# Altium PCB PCB1.PcbDoc (part 6 of 6)
Units mil, origin at the board's own origin, x right, y up, seen from the top; angles counter-clockwise.
Board outline 58000 x 19845 mil, 4 copper layers (Top Layer, MidLayer1, MidLayer2, Bottom Layer); 162 components, 222 nets, 4894 pads, 2245 vias.
Unrouted connection lines stored in the file: 192.
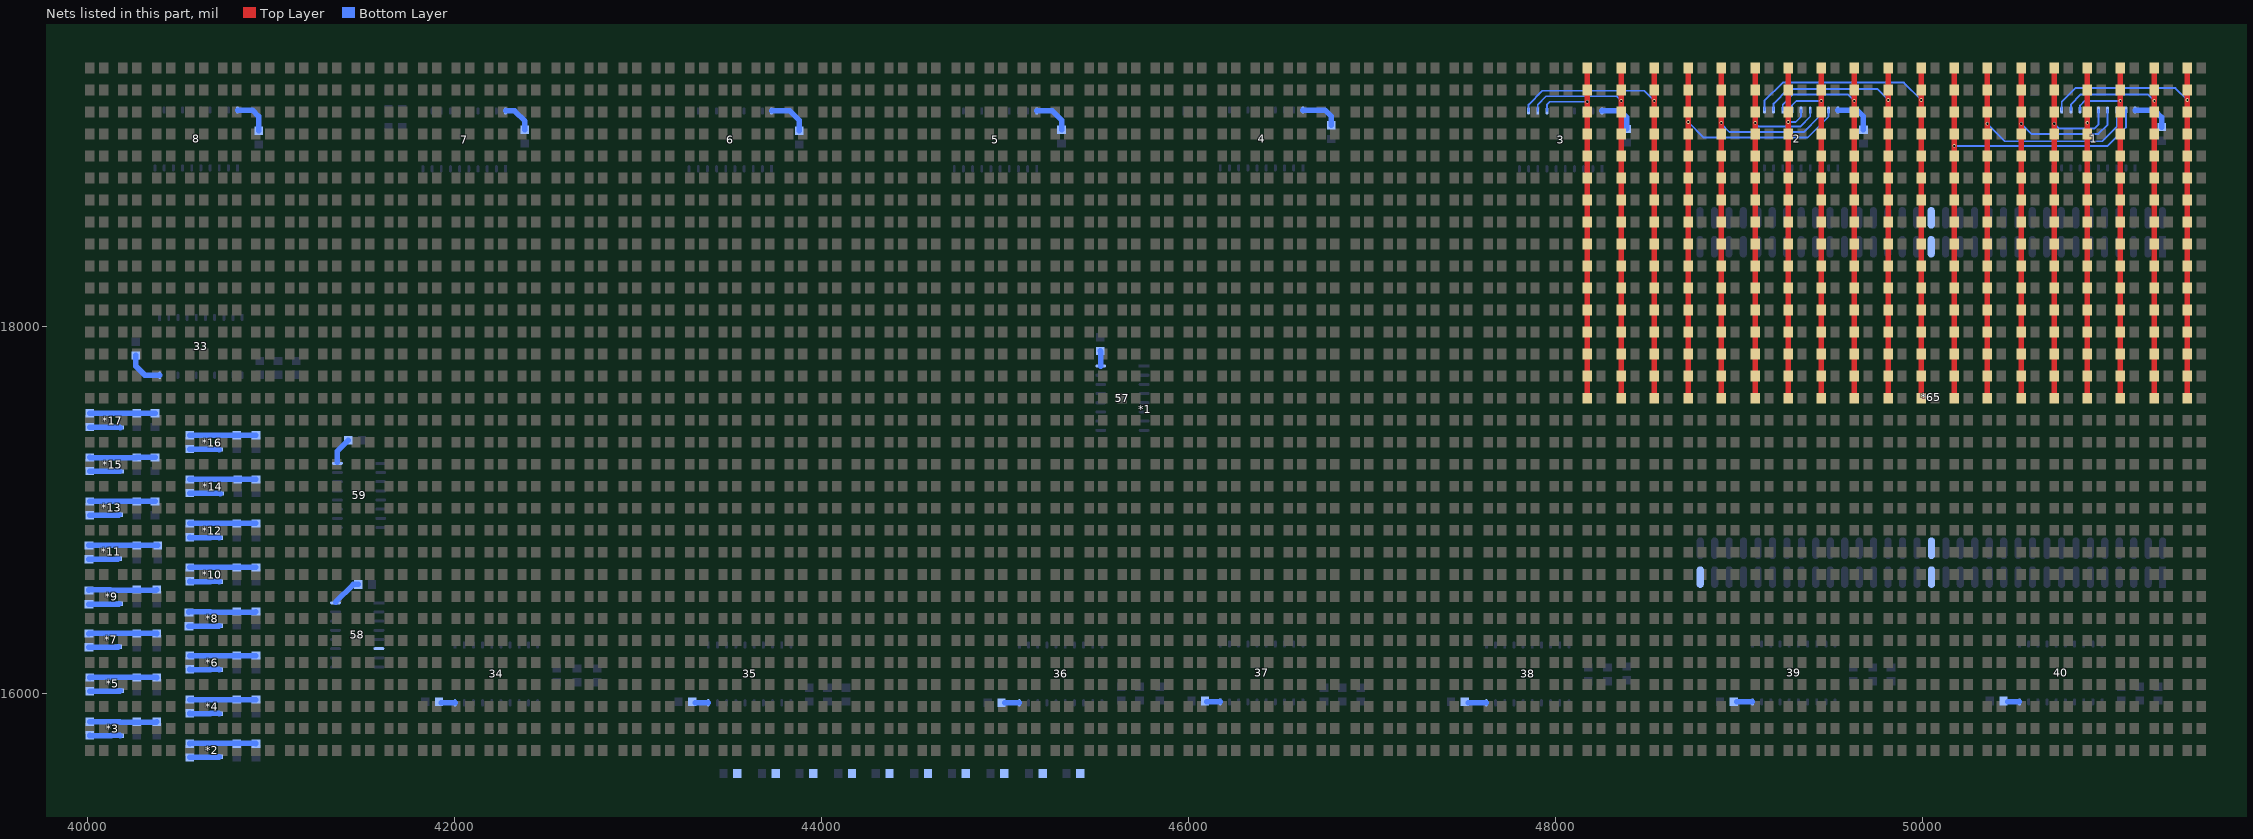
[diagram p8: the nets of this part, all layers, seen from the top]

## Via types
v1: diameter 20, hole 12, Top Layer to MidLayer1, 2032 vias
v2: diameter 20, hole 12, Top Layer to Bottom Layer, 143 vias
v3: diameter 20, hole 12, MidLayer2 to Bottom Layer, 70 vias

## Nets (pads, with @x,y where several pads share a name; then routed paths per layer and width w, separated by ;. In a path a pad name is that pad's centre, name@x,y a point inside that pad or via, vN(x,y) a via of type N, cw(c..) or ccw(c..) an arc to the next point about the centre after c; other vN are vias at no path point) (continued)
Net*1_126: 3.14 *1.126 | length 2061.3
  Top Layer w30: *1.126@48175,17605 *1.126@48175,19170 *1.126@48175,19405
  Bottom Layer w10: 3.14@47955,19174.96 47955,19210 47970,19225 v2(48175,19225)
Net*1_127: 3.13 *1.127 | length 2319
  Top Layer w30: *1.127@48360,17605 *1.127@48360,19170 *1.127@48360,19405
  Bottom Layer w10: 3.13@47905,19174.96 47905,19210 47950,19255 48335,19255 v2(48360,19230)
Net*1_128: 3.12 *1.128 | length 2573.9
  Top Layer w30: *1.128@48540,17605 *1.128@48540,19170 *1.128@48540,19290 *1.128@48540,19405
  Bottom Layer w10: 3.12@47855,19174.96 47855,19210 47930,19285 48485,19285 v2(48540,19230)
Net*1_129: 2.19 *1.129 | length 2682.8
  Top Layer w30: *1.129@48725,17615 *1.129@48725,19050 *1.129@48725,19170 *1.129@48725,19415
  Bottom Layer w10: v2(48725,19115) 48810,19030 49375,19030 49490,19145 2.19@49490,19179.96
Net*1_130: 2.18 *1.130 | length 2423.8
  Top Layer w30: *1.130@48905,17615 48905,18215 *1.130@48905,19050 *1.130@48905,19170 *1.130@48905,19415
  Bottom Layer w10: v2@48905,19105 48950,19060 49355,19060 49440,19145 2.18@49440,19179.96
  other v2: 48905,19110
Net*1_131: 2.17 *1.131 | length 2166
  Top Layer w30: *1.131@49090,17615 *1.131@49090,19170 *1.131@49090,19415
  Bottom Layer w10: v2(49090,19110) 49110,19090 49335,19090 49390,19145 2.17@49390,19179.96
Net*1_132: 2.16 *1.132 | length 1912.4
  Top Layer w30: *1.132@49270,17615 49270,18455 *1.132@49270,19170 *1.132@49270,19415
  Bottom Layer w10: v2@49275,19115 49310,19115 49340,19145 2.16@49340,19179.96
  other v2: 49270,19115
Net*1_133: 2.15 *1.133 | length 1995.4
  Top Layer w30: *1.133@49450,17615 *1.133@49450,19290 *1.133@49450,19415
  Bottom Layer w10: 2.15@49290,19179.96 49290,19205 49315,19230 v2(49450,19230)
Net*1_134: 2.14 *1.134 | length 2257.3
  Top Layer w30: *1.134@49630,17615 *1.134@49630,19290 *1.134@49630,19415
  Bottom Layer w10: 2.14@49240,19179.96 49240,19210 49295,19265 49595,19265 v2(49630,19230)
Net*1_135: 2.13 *1.135 | length 2518
  Top Layer w30: *1.135@49815,17615 49815,18695 *1.135@49815,19290 *1.135@49815,19410 *1.135@49815,19415
  Bottom Layer w10: 2.13@49190,19179.96 49190,19215 49270,19295 49755,19295 v2(49815,19235)
Net*1_136: 2.12 *1.136 | length 2785.8
  Top Layer w30: *1.136@49995,17615 49995,18695 *1.136@49995,19290 *1.136@49995,19410 *1.136@49995,19415
  Bottom Layer w10: 2.12@49140,19179.96 49140,19230 49240,19330 49900,19330 v2(49995,19235)
Net*1_137: 1.19 *1.137 | length 2871.4
  Top Layer w30: *1.137@50175,17610 *1.137@50175,17730 *1.137@50175,17850 *1.137@50175,17970 *1.137@50175,18090 *1.137@50175,18210 *1.137@50175,18330 *1.137@50175,18450 *1.137@50175,18570 *1.137@50175,18690 *1.137@50175,18810 *1.137@50175,18930 *1.137@50175,19050 *1.137@50175,19170 *1.137@50175,19290 *1.137@50175,19410
  Bottom Layer w10: v2(50175,18985) 51010,18985 51110,19085 1.19@51110,19179.96
Net*1_138: 1.18 *1.138 | length 2667.4
  Top Layer w30: *1.138@50355,17610 *1.138@50355,17730 *1.138@50355,17850 *1.138@50355,17970 *1.138@50355,18090 *1.138@50355,18210 *1.138@50355,18330 *1.138@50355,18450 *1.138@50355,18570 *1.138@50355,18690 *1.138@50355,18810 *1.138@50355,18930 *1.138@50355,19050 *1.138@50355,19170 *1.138@50355,19290 *1.138@50355,19410
  Bottom Layer w10: v2(50355,19105) 50450,19010 50980,19010 51060,19090 1.18@51060,19179.96
Net*1_139: 1.17 *1.139 | length 2393.5
  Top Layer w30: *1.139@50540,17610 *1.139@50540,17730 *1.139@50540,17850 *1.139@50540,17970 *1.139@50540,18090 *1.139@50540,18210 *1.139@50540,18330 *1.139@50540,18450 *1.139@50540,18570 *1.139@50540,18690 *1.139@50540,18810 *1.139@50540,18930 *1.139@50540,19050 *1.139@50540,19170 *1.139@50540,19290 *1.139@50540,19410
  Bottom Layer w10: v2(50540,19105) 50595,19050 50960,19050 51010,19100 1.17@51010,19179.96
Net*1_140: 1.16 *1.140 | length 2138.6
  Top Layer w30: *1.140@50720,17610 *1.140@50720,17730 *1.140@50720,17850 *1.140@50720,17970 *1.140@50720,18090 *1.140@50720,18210 *1.140@50720,18330 *1.140@50720,18450 *1.140@50720,18570 *1.140@50720,18690 *1.140@50720,18810 *1.140@50720,18930 *1.140@50720,19050 *1.140@50720,19170 *1.140@50720,19290 *1.140@50720,19410
  Bottom Layer w10: v2(50720,19105) 50745,19080 50940,19080 50960,19100 1.16@50960,19179.96
Net*1_141: 1.15 *1.141 | length 1874.1
  Top Layer w30: *1.141@50900,17610 *1.141@50900,17730 *1.141@50900,17850 *1.141@50900,17970 *1.141@50900,18090 *1.141@50900,18210 *1.141@50900,18330 *1.141@50900,18450 *1.141@50900,18570 *1.141@50900,18690 *1.141@50900,18810 *1.141@50900,18930 *1.141@50900,19050 *1.141@50900,19170 *1.141@50900,19290 *1.141@50900,19410
  Bottom Layer w10: v2(50900,19110) 50910,19120 1.15@50910,19179.96
Net*1_142: 1.14 *1.142 | length 2055.4
  Top Layer w30: *1.142@51080,17610 *1.142@51080,17730 *1.142@51080,17850 *1.142@51080,17970 *1.142@51080,18090 *1.142@51080,18210 *1.142@51080,18330 *1.142@51080,18450 *1.142@51080,18570 *1.142@51080,18690 *1.142@51080,18810 *1.142@51080,18930 *1.142@51080,19050 *1.142@51080,19170 *1.142@51080,19290 *1.142@51080,19410
  Bottom Layer w10: 1.14@50860,19179.96 50860,19205 50885,19230 v2(51080,19230)
Net*1_143: 1.13 *1.143 | length 2322.3
  Top Layer w30: *1.143@51265,17610 *1.143@51265,17730 *1.143@51265,17850 *1.143@51265,17970 *1.143@51265,18090 *1.143@51265,18210 *1.143@51265,18330 *1.143@51265,18450 *1.143@51265,18570 *1.143@51265,18690 *1.143@51265,18810 *1.143@51265,18930 *1.143@51265,19050 *1.143@51265,19170 *1.143@51265,19290 *1.143@51265,19410
  Bottom Layer w10: 1.13@50810,19179.96 50810,19210 50865,19265 51230,19265 v2(51265,19230)
Net*1_144: 1.12 *1.144 | length 2588
  Top Layer w30: *1.144@51445,17610 *1.144@51445,17730 *1.144@51445,17850 *1.144@51445,17970 *1.144@51445,18090 *1.144@51445,18210 *1.144@51445,18330 *1.144@51445,18450 *1.144@51445,18570 *1.144@51445,18690 *1.144@51445,18810 *1.144@51445,18930 *1.144@51445,19050 *1.144@51445,19170 *1.144@51445,19290 *1.144@51445,19410
  Bottom Layer w10: 1.12@50760,19179.96 50760,19225 50835,19300 51380,19300 v2(51445,19235)
Net*2_2: 9.1 13.1 17.2 *2.2 | length 362.8
  Bottom Layer w30: 9.1@40560,15727.4 40560,15729.41 40917.99,15729.41 13.1@40920,15727.4
Net*3_2: 10.1 14.1 18.2 *3.2 | length 367
  Bottom Layer w30: 10.1@40015,15847.4 40177.6,15847.4 *3.2@40180,15845 40377.6,15845 14.1@40380,15847.4
Net*4_2: 11.1 15.1 19.2 *4.2 | length 360
  Bottom Layer w30: 11.1@40560,15967.4 15.1@40920,15967.4
Net*5_2: 12.1 16.1 20.2 *5.2 | length 367.8
  Bottom Layer w30: 12.1@40015,16087.4 40015,16089.41 40377.99,16089.41 16.1@40380,16087.4
Net*6_2: 21.1 25.1 29.2 *6.2 | length 360
  Bottom Layer w30: 21.1@40560,16207.4 25.1@40920,16207.4
Net*7_2: 22.1 26.1 30.2 *7.2 | length 372.8
  Bottom Layer w30: 22.1@40010,16327.4 40012.01,16329.41 40380,16329.41 30.2@40380,16327.4
Net*8_2: 23.1 27.1 31.2 *8.2 | length 370.7
  Bottom Layer w30: 23.1@40555,16442.4 40555,16445 40670.71,16445 40673.31,16442.4 40915,16442.4 27.1@40920,16447.4
Net*9_2: 24.1 28.1 32.2 *9.2 | length 375.7
  Bottom Layer w30: 24.1@40010,16562.4 40010,16565 40125.71,16565 40128.31,16562.4 40375,16562.4 28.1@40380,16567.4
Net*10_2: 41.1 45.1 49.2 *10.2 | length 360
  Bottom Layer w30: 41.1@40560,16687.4 45.1@40920,16687.4
Net*11_2: 42.1 46.1 50.2 *11.2 | length 377.8
  Bottom Layer w30: 42.1@40010,16807.4 40010,16809.41 40382.99,16809.41 46.1@40385,16807.4
Net*12_2: 43.1 47.1 51.2 *12.2 | length 360
  Bottom Layer w30: 43.1@40560,16927.4 47.1@40920,16927.4
Net*13_2: 44.1 48.1 52.2 *13.2 | length 357.8
  Bottom Layer w30: 44.1@40015,17047.4 40015,17049.41 40126.3,17049.41 40128.31,17047.4 48.1@40269.8,17047.4 52.2@40370,17047.4
Net*14_2: 53.1 60.1 64.2 *14.2 | length 360
  Bottom Layer w30: 53.1@40560,17167.4 60.1@40820,17167.4 64.2@40920,17167.4
Net*15_2: 54.1 61.1 65.2 *15.2 | length 357
  Bottom Layer w30: 54.1@40015,17287.4 40017.4,17285 40267.8,17285 61.1@40270.2,17287.4 65.2@40370,17287.4
Net*16_2: 55.1 62.1 66.2 *16.2 | length 360
  Bottom Layer w30: 55.1@40560,17407.4 62.1@40815,17407.4 66.2@40920,17407.4
Net*17_2: 56.1 63.1 67.2 *17.2 | length 355
  Bottom Layer w30: 56.1@40015,17527.4 63.1@40270.2,17527.4 67.2@40370,17527.4
VCC: 1.20 2.20 3.20 4.20 5.20 6.20 7.20 8.20 9.2 10.2 11.2 12.2 21.2 22.2 23.2 24.2 33.20 34.20 35.20 36.20 37.20 38.20 39.20 40.20 41.2 42.2 43.2 44.2 53.2 54.2 55.2 56.2 57.16 58.6 58.16 59.16 68.1 69.1 70.1 71.1 72.1 73.1 74.1 75.1 76.1 77.1 78.1 79.1 80.1 81.1 82.1 83.1 84.1 85.1 86.1 87.1 88.1 89.1 90.1 91.1 92.1 93.1 94.1 95.1 96.1 *2.3 *3.3 *4.3 *5.3 *6.3 *7.3 *8.3 *9.3 *10.3 *11.3 *12.3 *13.3 *14.3 *15.3 *16.3 *17.3 *65.17 *65.33 *65.50 *65.83 *65.116 | length 5471.4
  Bottom Layer w30: 22.2@40010,16252.6 40167.4,16252.6 *7.3@40170,16255.2 ; 24.2@40010,16487.6 40172.4,16487.6 *9.3@40175,16490.2 ; 42.2@40010,16732.6 40167.4,16732.6 *11.3@40170,16735.2 ; 10.2@40015,15772.6 40015,15770.79 40131.3,15770.79 40133.11,15772.6 40177.6,15772.6 *3.3@40180,15770.2 ; 12.2@40015,16012.6 40177.4,16012.6 *5.3@40180,16015.2 ; 44.2@40015,16972.6 40172.4,16972.6 *13.3@40175,16975.2 ; 54.2@40015,17212.6 40015,17210.79 40131.3,17210.79 40133.11,17212.6 *15.3@40177.6,17212.6 ; 56.2@40015,17452.6 40015,17450.79 40131.3,17450.79 40133.11,17452.6 40177.6,17452.6 *17.3@40180,17450.2 ; 79.1@40265,17842.6 40265,17785 40314.96,17735.04 33.20@40395,17735.04 ; 23.2@40555,16367.6 40717.4,16367.6 *8.3@40720,16370.2 ; 9.2@40560,15652.6 40717.4,15652.6 *2.3@40720,15655.2 ; 11.2@40560,15892.6 40560,15890.79 40671.3,15890.79 40673.11,15892.6 40717.6,15892.6 *4.3@40720,15890.2 ; 21.2@40560,16132.6 40560,16130.79 40671.3,16130.79 40673.11,16132.6 40717.6,16132.6 *6.3@40720,16130.2 ; 41.2@40560,16612.6 40560,16610.79 40671.3,16610.79 40673.11,16612.6 40717.6,16612.6 *10.3@40720,16610.2 ; 43.2@40560,16852.6 40560,16850.79 40671.3,16850.79 40673.11,16852.6 40717.6,16852.6 *12.3@40720,16850.2 ; 53.2@40560,17092.6 40560,17090.79 40676.3,17090.79 40678.11,17092.6 40722.6,17092.6 *14.3@40725,17090.2 ; 55.2@40560,17332.6 40560,17330.79 40671.3,17330.79 40673.11,17332.6 40717.6,17332.6 *16.3@40720,17330.2 ; 8.20@40820,19179.96 40900.04,19179.96 40935,19145 82.1@40935,19067.4 ; 58.16@41353.78,16498.27 41450.51,16595 80.1@41477.6,16595 ; 59.16@41363.78,17260 41363.78,17321.18 96.1@41422.6,17380 ; 81.1@41930,15950.04 34.20@42005,15950.04 ; 7.20@42280,19174.96 42330.04,19174.96 42385,19120 85.1@42385,19072.4 ; 83.1@43315,15950.04 35.20@43385,15950.04 ; 6.20@43730,19174.96 43830.04,19174.96 43880,19125 92.1@43880,19067.4 ; 84.1@44999.96,15950.04 36.20@45080,15950.04 ; 5.20@45175,19174.96 45260.04,19174.96 45310,19125 95.1@45310,19072.4 ; 68.1@45520,17867.6 45523.78,17863.82 57.16@45523.78,17785 ; 86.1@46099.96,15955.04 37.20@46175,15955.04 ; 4.20@46625,19179.96 46745.04,19179.96 46780,19145 94.1@46780,19097.4 ; 87.1@47524.96,15950.04 38.20@47625,15950.04 ; 3.20@48255,19174.96 48355.04,19174.96 48390,19140 93.1@48390,19077.4 ; 88.1@48990,15955 48990.04,15955.04 39.20@49075,15955.04 ; 2.20@49540,19179.96 49645.04,19179.96 49680,19145 91.1@49680,19072.4 ; 50464.96,15955.04 40.20@50530,15955.04 ; 1.20@51160,19179.96 51265.04,19179.96 51305,19140 90.1@51305,19087.4
pads on no net: 1.1 2.1 3.1 4.1 5.1 6.1 7.1 8.1 33.1 34.1 35.1 36.1 37.1 38.1 39.1 40.1 57.1 57.2 57.3 57.4 57.5 57.6 *65.2 *65.3 *65.4 *65.5 *65.6 *65.7 *65.8 *65.9 *65.10 *65.11 *65.12 *65.13 *65.14 *65.15 *65.16 *65.19 *65.20 *65.21 *65.22 *65.23 *65.24 *65.25 *65.26 *65.27 *65.28 *65.29 *65.30 *65.31 *65.32 *65.35 *65.36 *65.37 *65.38 *65.39 *65.40 *65.41 *65.42 *65.43 *65.44 *65.45 *65.46 *65.47 *65.48 *65.51 *65.52 *65.53 *65.54 *65.55 *65.56 *65.57 *65.58 *65.59 *65.60 *65.61 *65.62 *65.63 *65.64 *65.65 *65.66 *65.67 *65.68 *65.69 *65.70 *65.71 *65.72 *65.73 *65.74 *65.75 *65.76 *65.77 *65.78 *65.79 *65.80 *65.81 *65.82 *65.85 *65.86 *65.87 *65.88 *65.89 *65.90 *65.91 *65.92 *65.93 *65.94 *65.95 *65.96 *65.97 *65.98 *65.100 *65.101 *65.102 *65.103 *65.104 *65.105 *65.106 *65.107 *65.108 *65.109 *65.110 *65.111 *65.112 *65.113 *65.114 *65.115 *65.117 *65.118 *65.119 *65.120 *65.121 *65.122 *65.123 *65.124 *65.125 *65.126 *65.127 *65.128 *65.129 *65.130 *65.131